# EAGLE board Placa_Power_ESP_brd (EAGLE 9.7.0)
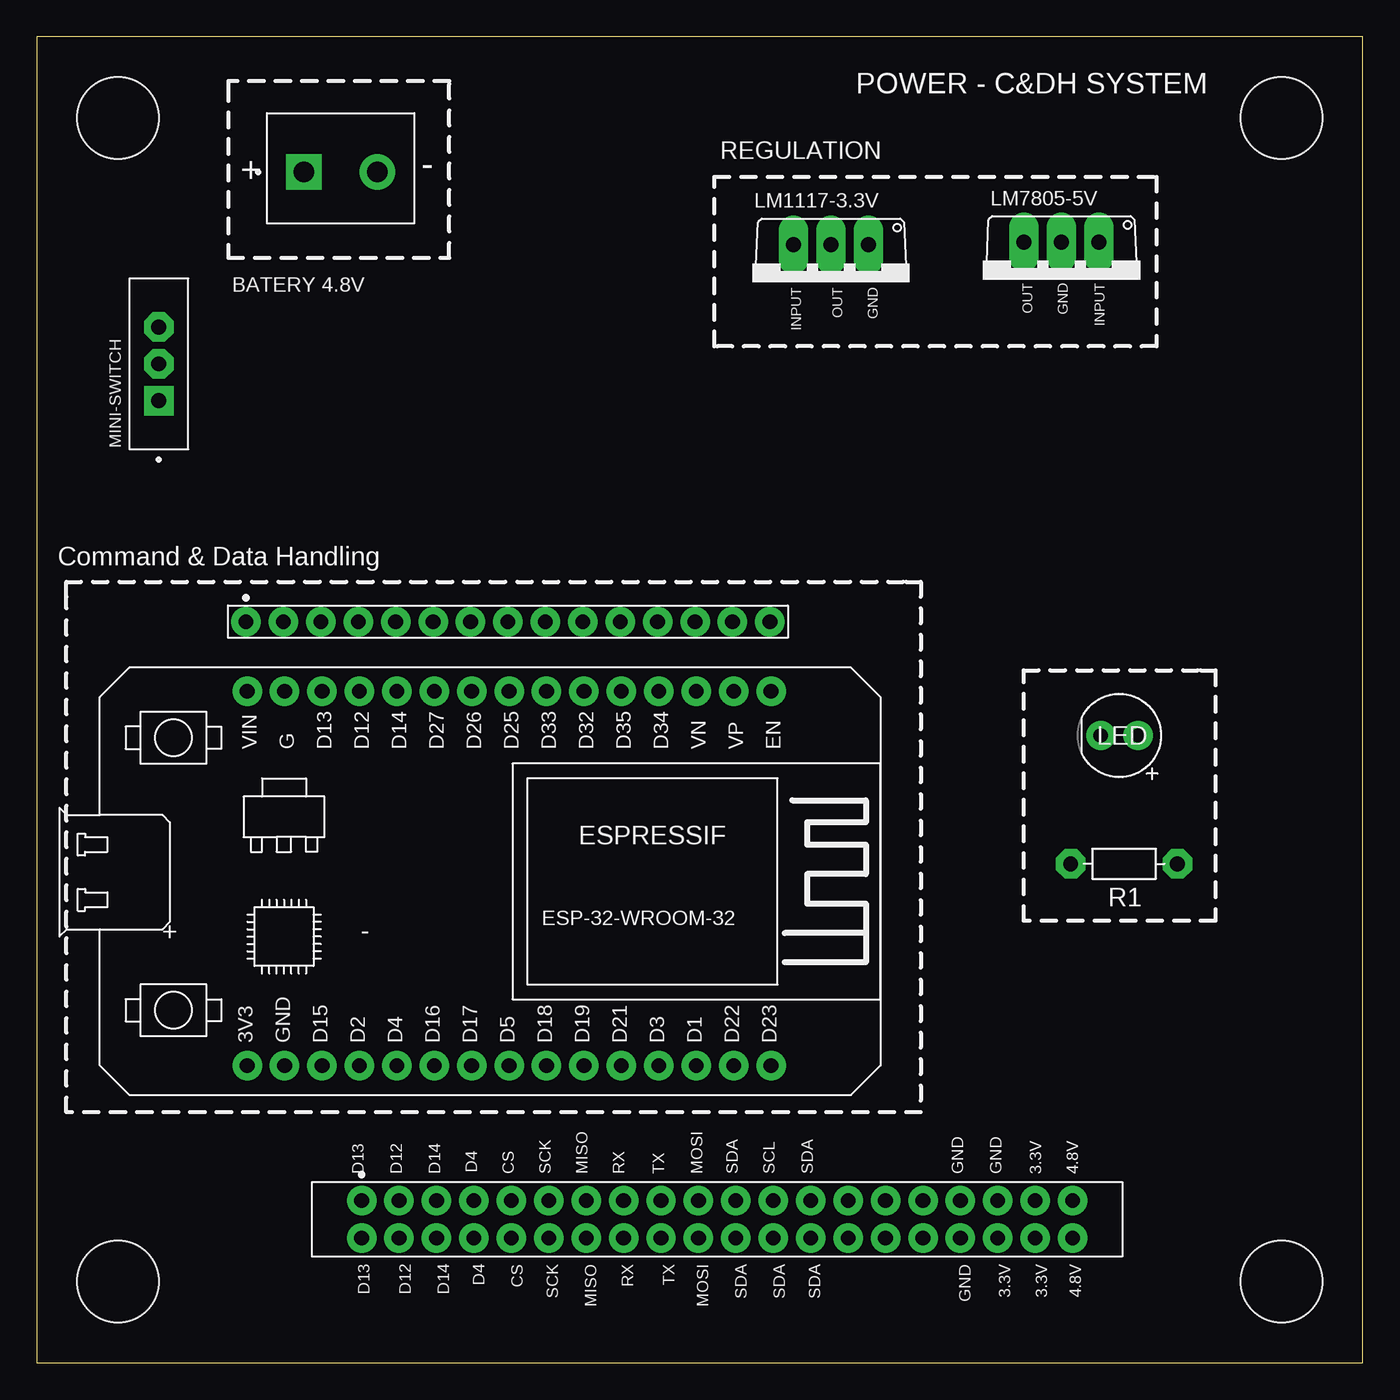
[diagram p0: board, top side]
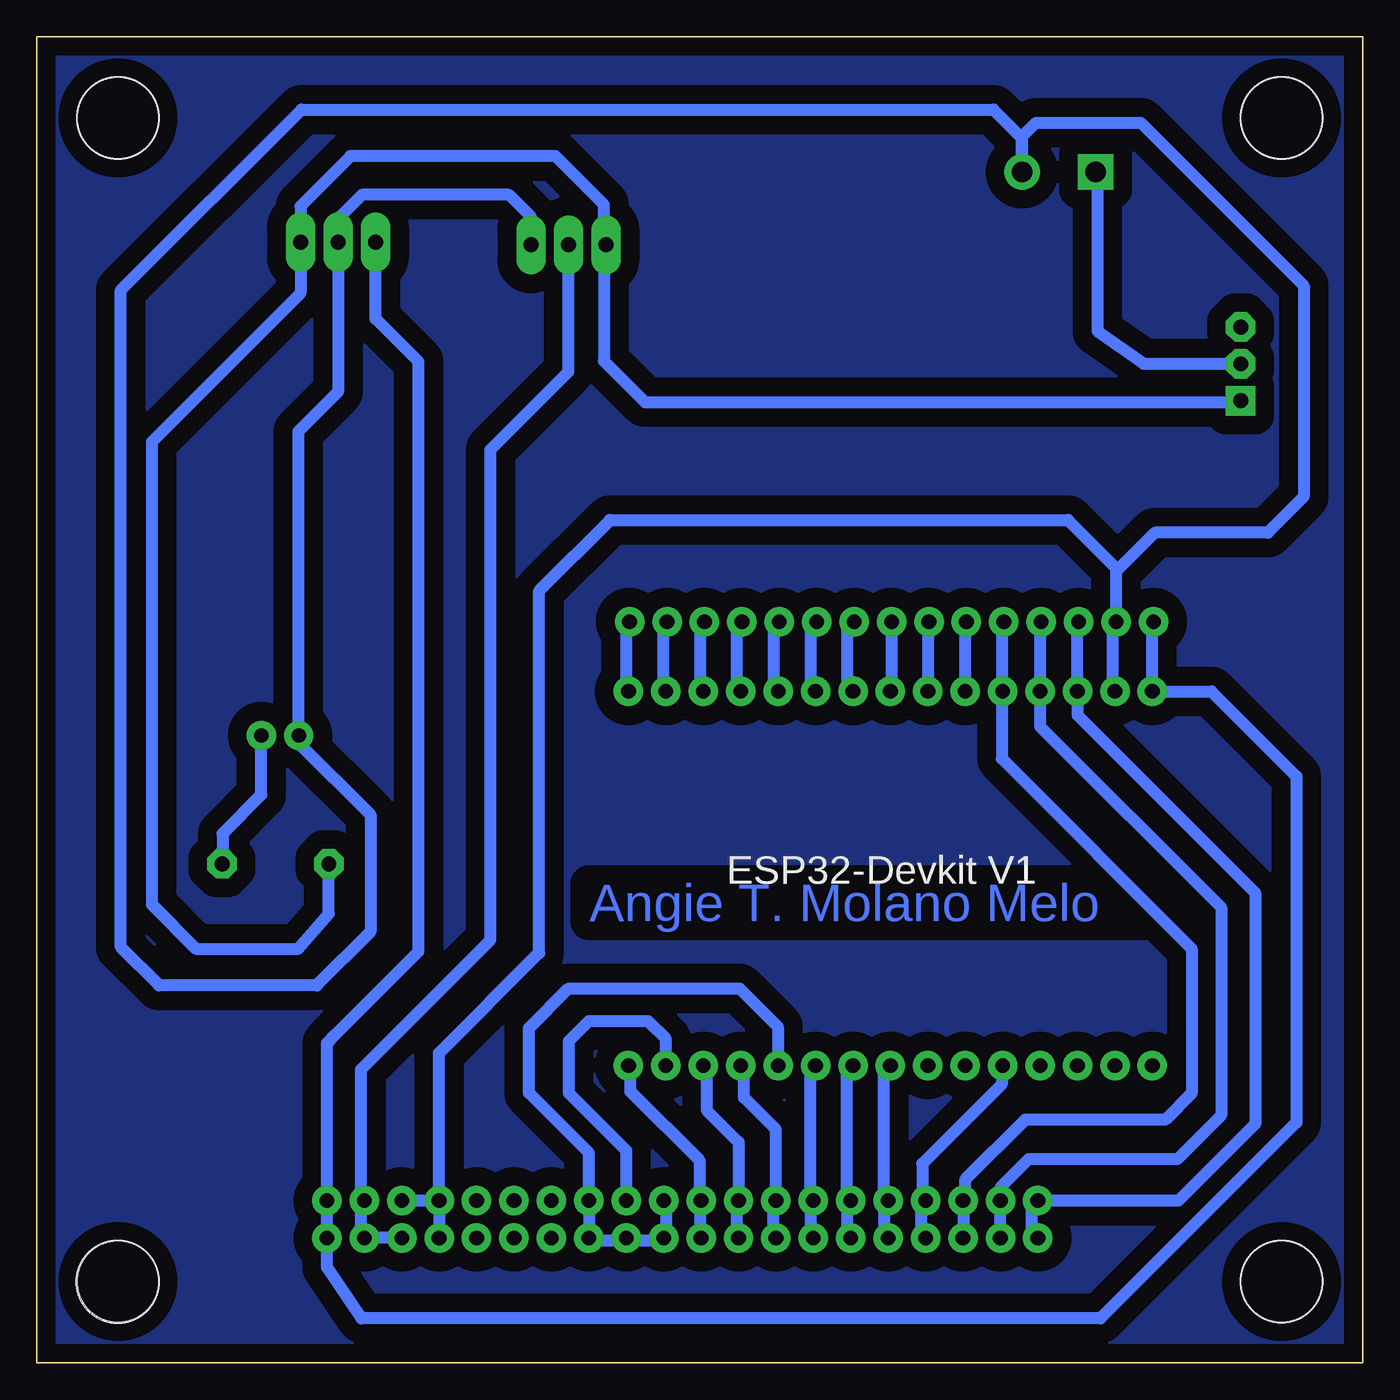
[diagram p1: board, bottom side, seen from below]

Size 90 x 90 mm. Coordinates in mm from the lower left corner, seen from the top.
Outline: 0,90 0,0 90,0 90,90 0,90
Copper layers (1*16): Top 0.035mm / dielectric 1.53mm / Bottom 0.035mm
Design rules "LCFI Uniandes DRC (Eagle-Fusion360 11-2022) *": minimum track width 10mil, minimum drill 0.6mm, track to track 0.3mm, track to pad 0.3mm, pad to pad 0.5mm, via to via 0.3mm, smd to smd 0.2mm, copper to edge 0.5mm, drill to drill 0.5mm, minimum pad ring 0.5mm, minimum via ring 0.3mm, stop-mask expansion 0.05mm, vias tented up to drill 0mil, thermal gap 0.3mm
Holes 5.5 mm at 5.5,84.5 84.5,84.5 5.5,5.5 84.5,5.5

## Footprints (pad centres in the part's own frame; a part is rotated, then mirrored left to right if it is on the bottom)
LEDRD254W60D565H860B_Y = drill 0.981 pad 1.581: A -1.27,0; C 1.27,0
ESP32-DEVKITV1 = drill 1 pad 1.93: 3V3 0,0; D1 30.48,0; D2 7.62,0; D3 27.94,0; D4 10.16,0; D5 17.78,0; D12 7.62,25.4; D13 5.08,25.4; D14 10.16,25.4; D15 5.08,0; D16 12.7,0; D17 15.24,0; D18 20.32,0; D19 22.86,0; D21 25.4,0; D22 33.02,0; D23 35.56,0; D25 17.78,25.4; D26 15.24,25.4; D27 12.7,25.4; D32 22.86,25.4; D33 20.32,25.4; D34 27.94,25.4; D35 25.4,25.4; EN 35.56,25.4; GND 2.54,25.4; GND@1 2.54,0; VIN 0,25.4; VN 30.48,25.4; VP 33.02,25.4
TO220V = drill 1.016 long: 1 -2.54,-2.54; 2 0,-2.54; 3 2.54,-2.54
HANDSON_KF301-2P = drill 1.4 square: 1 -2.5,0 | drill 1.4: 2 2.5,0
SW_MINI-SPDT-SW-BACKUP = drill 1 pad 1.778 square: 1 -2.5,0 | drill 1 pad 1.778 octagon: 2 0,0; 3 2.5,0
RESAD724W46L381D178B = drill 1 pad 1.93 octagon: 1 -3.62,0; 2 3.62,0
PIN_1X15 = drill 1 pad 1.93: 1 0,0; 2 2.54,0; 3 5.08,0; 4 7.62,0; 5 10.16,0; 6 12.7,0; 7 15.24,0; 8 17.78,0; 9 20.32,0; 10 22.86,0; 11 25.4,0; 12 27.94,0; 13 30.48,0; 14 33.02,0; 15 35.56,0
PINHEADER = drill 1 pad 1.676: 1 0,0; 2 2.54,0; 3 5.08,0; 4 7.62,0; 5 10.16,0; 6 12.7,0; 7 15.24,0; 8 17.78,0; 9 20.32,0; 10 22.86,0; 11 25.4,0; 12 27.94,0; 13 30.48,0; 14 33.02,0; 15 35.56,0; 16 38.1,0; 17 40.64,0; 18 43.18,0; 19 45.72,0; 20 48.26,0; 21 48.26,-2.54; 22 45.72,-2.54; 23 43.18,-2.54; 24 40.64,-2.54; 25 38.1,-2.54; 26 35.56,-2.54; 27 33.02,-2.54; 28 30.48,-2.54; 29 27.94,-2.54; 30 25.4,-2.54; 31 22.86,-2.54; 32 20.32,-2.54; 33 17.78,-2.54; 34 15.24,-2.54; 35 12.7,-2.54; 36 10.16,-2.54; 37 7.62,-2.54; 38 5.08,-2.54; 39 2.54,-2.54; 40 0,-2.54

## Placement (x,y rotation side)
D1  LED  [LEDRD254W60D565H860B_Y]  73.49,42.57 180 top
ESP32DEVKIT  ESP32DEVKITV1SHRIDATTDUDHAT  [ESP32-DEVKITV1]  14.28,20.17 0 top
IC2  LM7805-5V  [TO220V]  69.56,73.52 180 top
J1  BATERY 4.8V  [HANDSON_KF301-2P]  20.62,80.82 0 top
LM1117-3.3V  LM1117-3.3  [TO220V]  53.91,73.34 180 top
MINI-SWITCH  MINI-SPDT-SW  [SW_MINI-SPDT-SW-BACKUP]  8.28,67.8 90 top
R1  [RESAD724W46L381D178B]  73.8,33.86 0 top
U$1  PIN_1X15  [PIN_1X15]  14.2,50.3 0 top
U$3  PINHEADER  [PINHEADER]  22.05,11 0 top

## Library data of the parts
D1 = Opto-Electronic
ESP32DEVKIT = ESP32-DEVKITV1
IC2 LM1117-3.3V = IC_Power-Management; CATEGORY: IC_Linear; DESCRIPTION: Adjustable voltage regulator; MANUFACTURER: STMicroelectronics; MPN: Generic; SERIES: LM1117; SUB-CATEGORY: Voltage Regulator; TYPE: Linear
J1 = KF301-2P; AVAILABILITY: Not in stock; CHECK_PRICES: https://www.snapeda.com/parts/KF301-2P/Handson+Technology/view-part/?ref=eda; DESCRIPTION: 2 Pin Terminal Block 5mm Pitch; MF: Handson Technology; MP: KF301-2P; PACKAGE: None; PRICE: None; SNAPEDA_LINK: https://www.snapeda.com/parts/KF301-2P/Handson+Technology/view-part/?ref=snap
MINI-SWITCH = MINI-SPDT-SW
R1 = Resistor; CATEGORY: Resistor; SUB-CATEGORY: Fixed
U$1 = PIN_1X15
U$3 = PINHEADER-40

## Nets
3.3V: LM1117-3.3V.2 U$3.19 U$3.22 U$3.23
4.8+: J1.1 MINI-SWITCH.2
4.8V: ESP32DEVKIT.VIN IC2.3 U$1.1 U$3.20 U$3.21
CS: ESP32DEVKIT.D5 U$3.5 U$3.36
D2: ESP32DEVKIT.D2
D4: ESP32DEVKIT.D4 U$3.4 U$3.37
D12: ESP32DEVKIT.D12 U$1.4 U$3.2 U$3.39
D13: ESP32DEVKIT.D13 U$1.3 U$3.1 U$3.40
D14: ESP32DEVKIT.D14 U$1.5 U$3.3 U$3.38
GND: D1.C ESP32DEVKIT.GND IC2.2 J1.2 LM1117-3.3V.1 U$1.2 U$3.17 U$3.18 U$3.24
MISO: ESP32DEVKIT.D19 U$3.7 U$3.34
MOSI: ESP32DEVKIT.D23 U$3.10 U$3.31
N$2: D1.A R1.2
N$3: ESP32DEVKIT.EN U$1.15
N$4: ESP32DEVKIT.VP U$1.14
N$5: ESP32DEVKIT.VN U$1.13
N$6: ESP32DEVKIT.D34 U$1.12
N$7: ESP32DEVKIT.D35 U$1.11
N$8: ESP32DEVKIT.D32 U$1.10
N$9: ESP32DEVKIT.D33 U$1.9
N$10: ESP32DEVKIT.D25 U$1.8
N$11: ESP32DEVKIT.D26 U$1.7
N$12: ESP32DEVKIT.D27 U$1.6
N$13: IC2.1 LM1117-3.3V.3 MINI-SWITCH.1 R1.1
RX: ESP32DEVKIT.D3 U$3.8 U$3.33
SCK: ESP32DEVKIT.D18 U$3.6 U$3.35
SCL: ESP32DEVKIT.D22 U$3.12
SDA: ESP32DEVKIT.D21 U$3.11 U$3.13 U$3.28 U$3.29 U$3.30
TX: ESP32DEVKIT.D1 U$3.9 U$3.32

## Tracks (layer width: path | path; a pad name or v marks a point on that pad's centre or on a via)
3.3V
  Bottom 0.813: U$3.23 65.5,8.5 67.5,8.5 U$3.22 68,8.5 68,19.9 | 68,19.9 68,12.9 68,11.23 U$3.19 | 68,19.9 59.2,28.7 59.2,61.98 53.91,67.27 LM1117-3.3V.2
4.8+
  Bottom 0.813: MINI-SWITCH.2 14.86,67.8 18,70.04 18,80.5 J1.1
4.8V
  Bottom 0.813: U$1.1 14.3,50.2 14.3,45.61 ESP32DEVKIT.VIN 10.27,45.57 4.5,39.8 4.5,16.3 17.8,3 67.97,3 70.31,6.47 U$3.21 U$3.20 70.31,21.69 69.7,22.3 64.1,27.9 64.1,67.94 67.02,70.86 IC2.3
CS
  Bottom 0.813: 32.5,11 32.5,8.5 U$3.36 | 32.5,11 U$3.5 32.5,11 | 32.5,11 32.5,20 ESP32DEVKIT.D5
D4
  Bottom 0.813: 29.9,11 29.9,13.5 24.5,18.9 24.5,20 ESP32DEVKIT.D4 | U$3.37 30,8.5 30,11 29.9,11 | 29.9,11 U$3.4
D12
  Bottom 0.813: U$3.39 U$3.2 24.59,11.9 22.68,13.81 12.59,13.81 9.6,16.8 9.6,30.9 21.9,43.2 ESP32DEVKIT.D12 21.9,50.17 U$1.4
D13
  Bottom 0.813: U$3.40 22.5,8.5 22.5,11 U$3.1 22,11 12.5,11 7.3,16.2 7.3,31.9 18.71,43.31 19.36,43.96 19.36,44.07 ESP32DEVKIT.D13 19.4,45.7 19.4,50.14 U$1.3
D14
  Bottom 0.813: U$3.38 27.1,8.49 27.1,10.97 U$3.3 27,11 27,12.4 22.9,16.5 13.4,16.5 11.6,18.3 11.6,28.1 24.5,41 24.5,45.51 ESP32DEVKIT.D14 24.5,46 24.5,50 U$1.5
GND
  Bottom 0.813: U$3.17 U$3.24 | U$3.17 63,11 65,11 U$3.18 | U$3.17 | U$1.2 17,50 17,46 ESP32DEVKIT.GND | U$3.17 62.7,21 55.9,27.8 55.9,52.4 51.1,57.2 20,57.2 16.74,53.94 U$1.2 | LM1117-3.3V.1 56.45,77.78 57.96,79.28 67.93,79.28 69.56,77.65 IC2.2 69.56,65.91 72.26,63.21 72.26,42.62 D1.C 72.22,42.08 67.35,37.2 67.35,29.25 71,25.6 81.7,25.6 84.3,28.2 84.3,72.8 72.03,85.06 25.06,85.06 23.12,83.12 J1.2 23.12,83.22 22.17,84.17 15.06,84.17 4,73.1 4,58.78 6.44,56.34 14.1,56.34 16.74,53.7 U$1.2
MISO
  Bottom 0.813: 37.5,11 37.5,8.5 U$3.34 | 37.5,11 U$3.7 37.5,11 | ESP32DEVKIT.D19 37.5,19.81 37.5,11
MOSI
  Bottom 0.813: 45,11 45,13.7 49.7,18.4 49.7,20.1 ESP32DEVKIT.D23 | 45,11 45,8.5 U$3.31 | 45,11 U$3.10 45,11
N$1
  pour Bottom (isolate 1.27): 0.13,0.13 89.87,0.13 89.87,89.87 0.13,89.87
N$2
  Bottom 0.813: D1.A 74.76,38.54 77.4,35.9 77.4,33.87 R1.2
N$3
  Bottom 0.813: ESP32DEVKIT.EN 50,46 50,50 U$1.15
N$4
  Bottom 0.813: ESP32DEVKIT.VP 47.5,46 47.5,50 U$1.14
N$5
  Bottom 0.813: ESP32DEVKIT.VN 45,46 45,50 U$1.13
N$6
  Bottom 0.813: ESP32DEVKIT.D34 42.5,46 42.5,50 U$1.12
N$7
  Bottom 0.813: ESP32DEVKIT.D35 40,46 40,50 U$1.11
N$8
  Bottom 0.813: ESP32DEVKIT.D32 37.5,46 37.5,50 U$1.10
N$9
  Bottom 0.813: ESP32DEVKIT.D33 35,46 35,50 U$1.9
N$10
  Bottom 0.813: ESP32DEVKIT.D25 32,46 32,50 U$1.8
N$11
  Bottom 0.813: ESP32DEVKIT.D26 29.5,46 29.5,50 U$1.7
N$12
  Bottom 0.813: ESP32DEVKIT.D27 27,46 27,50 U$1.6
N$13
  Bottom 0.813: R1.1 70.18,30.46 72.26,28.1 79.2,28.1 82.2,31.1 82.2,62.5 72.1,72.6 IC2.1 72.1,78.5 68.7,81.9 54.8,81.9 51.5,78.6 51.5,76 LM1117-3.3V.3 51.5,75.75 51.5,68 48.7,65.2 8.38,65.2 MINI-SWITCH.1
RX
  Bottom 0.813: U$3.33 40,8.5 40,11 U$3.8 39.83,15.83 42,18 42,20 ESP32DEVKIT.D3
SCK
  Bottom 0.813: 35,11 35,8.5 U$3.35 | 35,11 U$3.6 35,11 | ESP32DEVKIT.D18 35,19.77 35,11
SCL
  Bottom 0.813: U$3.12 50,14.4 53.9,18.3 53.9,21.82 52.55,23.18 48.51,23.18 47.3,21.97 ESP32DEVKIT.D22
SDA
  Bottom 0.813: U$3.11 47.3,10.85 47.3,8.5 47.5,8.5 U$3.30 47.61,8.3 49.83,8.3 U$3.29 50.15,8.3 52.37,8.3 U$3.28 U$3.13 52.53,14.23 56.6,18.3 56.6,22.7 53.9,25.4 42.3,25.4 39.7,22.8 39.7,20.19 ESP32DEVKIT.D21
TX
  Bottom 0.813: U$3.32 42.5,8.5 42.5,11 U$3.9 42.37,14.97 44.5,17.1 44.5,20 ESP32DEVKIT.D1

## Text on the board
Bottom: Angie T. Molano Melo
tPlace: POWER - C&DH SYSTEM | REGULATION | + | - | LM7805-5V | LM1117-3.3V | BATERY 4.8V | INPUT | OUT | GND | OUT | GND | INPUT | Command & Data Handling | + | - | D13 | D12 | D14 | D4 | CS | SCK | MISO | RX | TX | MOSI | SDA | SCL | SDA | GND | GND | 3.3V | 4.8V | D13 | D12 | D14 | D4 | CS | SCK | MISO | RX | TX | MOSI | SDA | SDA | SDA | GND | 3.3V | 3.3V | 4.8V